# Altium PCB ROBOT_CONTROL.PcbDoc (part 2 of 2)
Units mm, origin at the board's own origin, x right, y up, seen from the top; angles counter-clockwise.
Board outline 110.37 x 59.34 mm, 2 copper layers (Top Layer, Bottom Layer); 66 components, 79 nets, 370 pads, 125 vias.
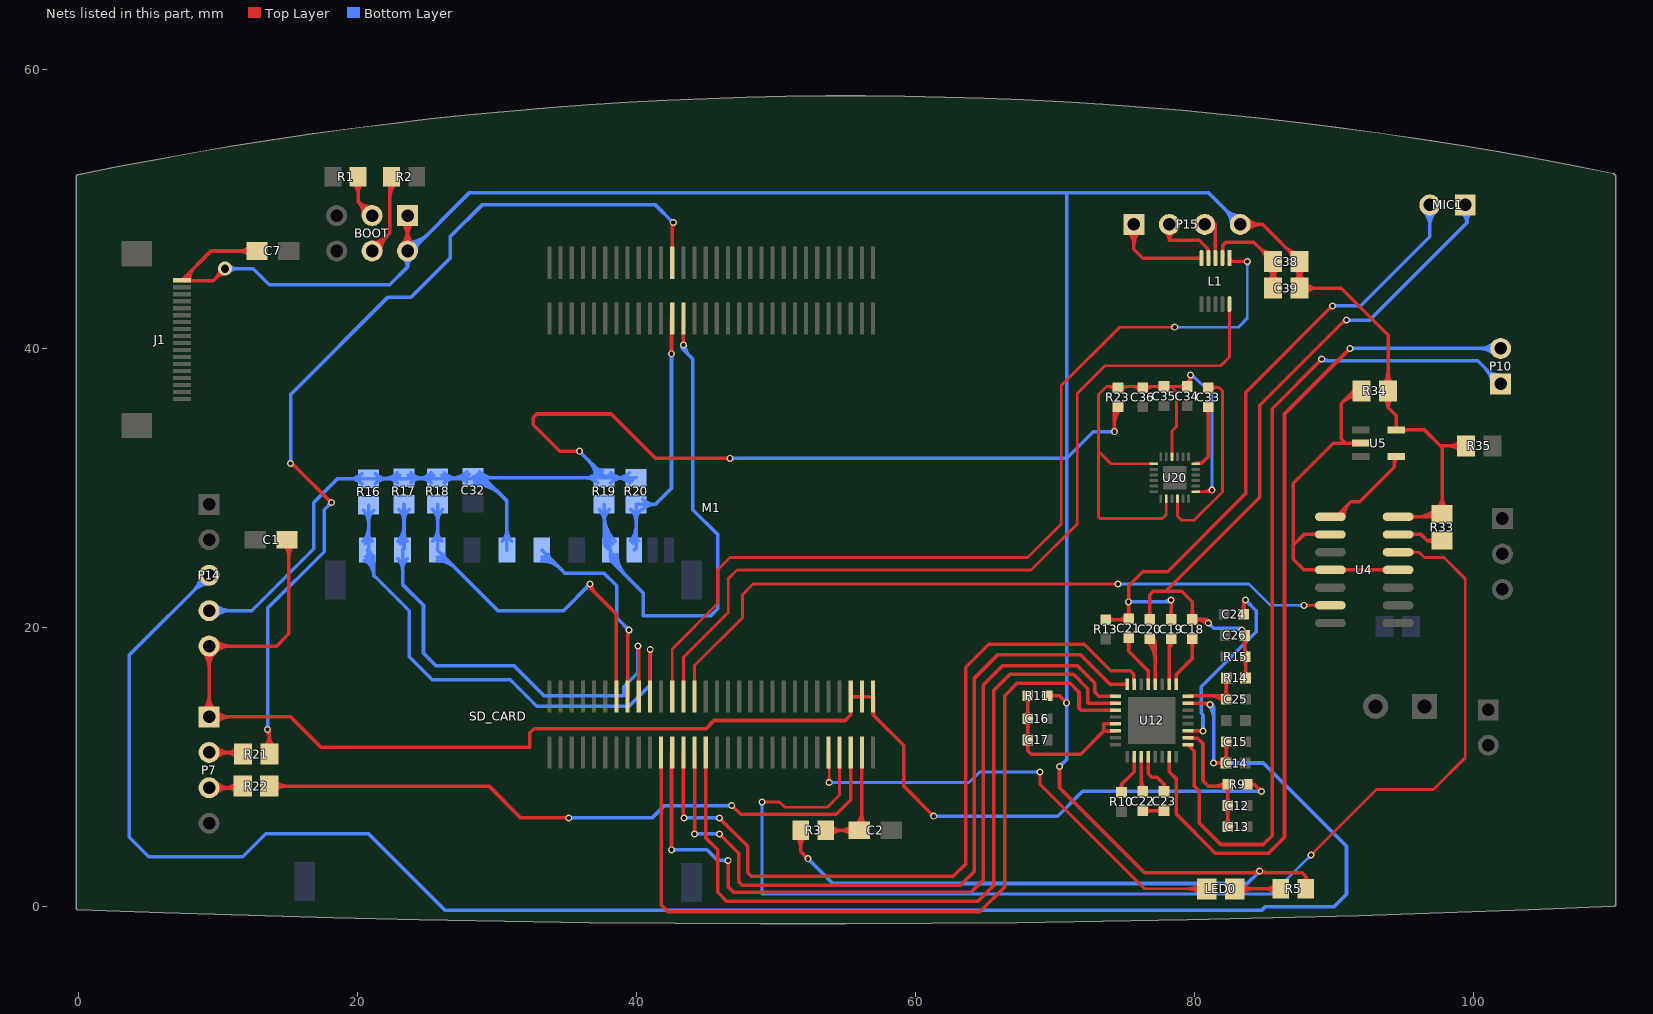
[diagram p2: the nets of this part, all layers, seen from the top]

## Via types
v1: diameter 0.5, hole 0.3, Top Layer to Bottom Layer, 114 vias
v2: diameter 0.7, hole 0.4, Top Layer to Bottom Layer, 9 vias
v3: diameter 1, hole 0.6, Top Layer to Bottom Layer, 2 vias

## Nets (pads, with @x,y where several pads share a name; then routed paths per layer and width w, separated by ;. In a path a pad name is that pad's centre, name@x,y a point inside that pad or via, vN(x,y) a via of type N, cw(c..) or ccw(c..) an arc to the next point about the centre after c; other vN are vias at no path point) (continued)
LED0: LED0.2 M1.J1_5 | length 40.1
  Top Layer w0.203: M1.J1_5@53.721,11.176 53.848,11.049 v1(53.848,8.89) ; v1@53.743,8.995 ccw(c53.49,9.248) 53.848,9.248 ccw(c54.206,9.248) v1@53.953,8.995 ; M1.J1_5@53.761,10.015 cw(c53.55,9.804) 53.848,9.804 ; v1@68.856,9.547 cw(c68.603,9.294) 68.961,9.294 cw(c69.319,9.294) v1@69.066,9.547 ; v1(68.961,9.652) 68.961,8.763 76.454,1.27 LED0.2@80.915,1.27 ; LED0.2@80.492,0.847 ccw(c79.47,-0.175) 79.47,1.27 ccw(c79.47,2.715) LED0.2@80.492,1.693 ; LED0.2@80.636,0.991 ccw(c79.961,0.316) 79.961,1.27 ccw(c79.961,2.224) LED0.2@80.636,1.549
  Bottom Layer w0.203: v1@53.721,8.89 v1(53.848,8.89) 63.881,8.89 64.643,9.652 v1(68.961,9.652) ; v1@53.953,8.785 cw(c54.206,8.532) 54.206,8.89 cw(c54.206,9.248) v1@53.953,8.995 ; v1@68.856,9.547 ccw(c68.603,9.294) 68.603,9.652 ccw(c68.603,10.01) v1@68.856,9.757
LED1: L1.3 P15.3 | length 3.2
  Top Layer w0.254: P15.3@80.772,48.895 81.534,48.895 L1.3@81.534,46.482
LED2: L1.4 P15.2 | length 7
  Top Layer w0.254: P15.2@77.894,48.371 cw(c77.495,47.752) 78.232,47.752 ; P15.2@78.232,48.895 78.232,47.752 ; P15.2@78.57,48.371 ccw(c78.969,47.752) 78.232,47.752 ; 80.871,47.249 cw(c80.534,46.912) L1.4@81.011,46.912 ; 80.924,47.197 cw(c80.7,46.973) L1.4@81.011,46.916 ; L1.4@81.034,46.482 81.011,46.505 81.011,47.11 80.369,47.752 78.232,47.752
LED3: L1.5 P15.1 | length 10.6
  Top Layer w0.254: P15.1@75.251,48.454 cw(c74.188,47.391) 75.692,47.391 cw(c77.196,47.391) P15.1@76.133,48.454 ; P15.1@75.431,48.634 cw(c74.801,48.004) 75.692,48.004 cw(c76.583,48.004) P15.1@75.953,48.634 ; P15.1@75.692,48.895 75.692,47.117 76.327,46.482 L1.5@80.534,46.482
NetBOOT_3: BOOT.3 R1.2 | length 8.4
  Top Layer w0.254: R1.2@19.743,51.89 cw(c18.935,51.082) 20.077,51.082 cw(c21.219,51.082) R1.2@20.411,51.89 ; R1.2@20.077,52.324 20.077,50.535 ; BOOT.3@20.46,49.555 ccw(c19.151,49.609) 20.077,50.535 ; BOOT.3@20.713,49.545 ccw(c19.938,49.577) 20.487,50.125 ccw(c21.035,50.674) BOOT.3@21.067,49.899 ; BOOT.3@21.057,50.152 cw(c21.003,51.461) 20.077,50.535 ; BOOT.3@21.082,49.53 20.077,50.535
NetBOOT_4: BOOT.4 R2.1 | length 12.2
  Top Layer w0.254: BOOT.4@21.082,46.99 22.352,48.26 22.352,52.197 R2.1@22.479,52.324 ; BOOT.4@21.082,47.359 ccw(c21.082,48.25) 21.712,47.62 ccw(c22.342,46.99) BOOT.4@21.451,46.99 ; BOOT.4@21.082,47.613 ccw(c21.082,49.117) 22.146,48.054 ccw(c23.209,46.99) BOOT.4@21.705,46.99 ; R2.1@22.145,51.89 cw(c21.644,51.389) 22.352,51.389 cw(c23.314,51.389) R2.1@22.634,52.069 ; 22.352,50.775 cw(c23.928,50.775) R2.1@22.813,51.89
NetC12_2: C12.2 C13.2 R9.1 U12.26 | length 13.6
  Top Layer w0.254: U12.26@79.563,12.085 79.583,12.065 80.264,12.065 80.645,11.684 80.645,9.017 81.026,8.636 82.296,8.636 R9.1@82.423,8.763 C12.2@82.423,7.239 C13.2@82.423,5.715 ; 81.503,8.636 ccw(c81.503,9.683) R9.1@82.243,8.943 ; C13.2@82.243,5.895 ccw(c81.81,6.328) 82.423,6.328 ccw(c83.036,6.328) C13.2@82.603,5.895 ; C12.2@82.243,7.059 cw(c81.81,6.626) 82.423,6.626 cw(c83.036,6.626) C12.2@82.603,7.059 ; C12.2@82.243,7.419 ccw(c81.81,7.852) 82.423,7.852 ccw(c83.036,7.852) C12.2@82.603,7.419 ; R9.1@82.243,8.583 cw(c81.81,8.15) 82.423,8.15 cw(c83.036,8.15) R9.1@82.603,8.583
NetC16_2: C16.2 C17.2 R11.2 U12.13 U12.14 | length 17.3
  Top Layer w0.254: C17.2@67.905,11.76 cw(c67.502,11.357) 68.072,11.357 ; C17.2@67.905,12.119 ccw(c67.471,12.553) 68.085,12.553 ccw(c68.698,12.553) C17.2@68.264,12.119 ; C16.2@67.905,13.284 cw(c67.471,12.85) 68.085,12.85 cw(c68.698,12.85) C16.2@68.264,13.284 ; C16.2@67.905,13.643 ccw(c67.471,14.077) 68.085,14.077 ccw(c68.698,14.077) C16.2@68.264,13.643 ; R11.2@67.905,14.935 cw(c67.471,14.501) 68.085,14.501 cw(c68.698,14.501) R11.2@68.264,14.935 ; 68.072,11.296 cw(c68.729,11.296) C17.2@68.264,11.76 ; C17.2@68.072,11.938 68.072,11.176 68.326,10.922 71.882,10.922 73.537,12.577 ; R11.2@68.072,15.24 68.085,15.227 R11.2@68.085,15.115 C16.2@68.085,13.464 C17.2@68.085,11.94 ; U12.14@74.349,12.573 74.353,12.577 73.537,12.577 ; U12.13@74.361,13.085 73.537,13.085 73.537,12.577
NetC18_1: C18.1 U12.1 | length 4.7
  Top Layer w0.254: U12.1@78.712,15.936 78.712,16.609 79.881,17.778 C18.1@79.881,19.19 ; C18.1@79.702,19.01 cw(c79.268,18.576) 79.881,18.576 cw(c80.495,18.576) C18.1@80.061,19.01
NetC18_2: C18.2 C20.2 C26.2 MIC1.1 R14.2 R15.2 | length 63.6
  Top Layer w0.254: C20.2@76.655,20.754 ccw(c76.222,21.187) 76.835,21.187 ccw(c77.448,21.187) C20.2@77.015,20.754 ; C20.2@76.835,20.574 76.835,22.352 77.089,22.606 77.978,22.606 ; C18.2@79.703,20.754 ccw(c79.27,21.187) 79.883,21.187 ccw(c80.496,21.187) 80.063,20.754 ccw(c80.496,21.187) 80.496,20.574 ccw(c80.496,19.961) C18.2@80.063,20.394 ; C18.2@80.116,20.574 cw(c80.116,19.41) v1@80.939,20.233 ; 80.729,20.574 cw(c80.729,20.023) v1@81.119,20.413 ; v1(81.026,20.32) 80.772,20.574 C18.2@79.883,20.574 79.883,21.844 79.121,22.606 77.978,22.606 ; C26.2@83.45,19.25 cw(c83.016,18.816) 83.629,18.816 cw(c84.243,18.816) C26.2@83.809,19.25 ; R15.2@83.501,17.726 cw(c83.036,17.262) 83.693,17.262 ; R15.2@83.501,18.085 ccw(c83.19,18.396) 83.629,18.396 ; R14.2@83.513,16.563 ccw(c83.08,16.996) 83.693,16.996 ccw(c84.306,16.996) R14.2@83.873,16.563 ; 83.629,18.641 ccw(c84.416,18.641) R15.2@83.86,18.085 ; C26.2@83.629,19.429 83.629,17.956 R15.2@83.68,17.905 83.693,17.893 R14.2@83.693,16.383 ; 83.693,17.323 cw(c84.263,17.323) R15.2@83.86,17.726 ; 90.505,41.737 cw(c90.932,41.31) v1@90.932,41.914 ; v1(90.932,42.037) 90.805,42.037 84.709,35.941 84.709,29.337 77.978,22.606
  Bottom Layer w0.254: v1@81.026,20.197 cw(c81.026,19.9) 81.236,20.11 cw(c81.446,20.32) v1@81.149,20.32 ; v1(81.026,20.32) 81.407,19.939 83.312,19.939 v1(83.439,19.812) ; 82.835,19.939 cw(c82.835,19.208) v1@83.352,19.725 ; v1(90.932,42.037) 92.583,42.037 99.568,49.022 MIC1.1@99.568,50.292 ; v1@91.019,41.95 cw(c91.229,41.74) 91.229,42.037 cw(c91.229,42.334) v1@91.019,42.124 ; MIC1.1@99.138,49.748 cw(c98.73,49.016) 99.568,49.016 ; MIC1.1@99.261,49.97 cw(c98.971,49.448) 99.568,49.448 ; 99.568,49.095 cw(c100.638,49.095) MIC1.1@99.882,49.851
NetC19_1: C19.1 U12.2 | length 4.2
  Top Layer w0.254: U12.2@78.212,15.936 78.212,19.044 C19.1@78.357,19.19 ; 78.212,18.226 cw(c79.322,18.226) C19.1@78.537,19.01
NetC19_2: C19.2 C21.2 MIC1.2 R13.2 | length 57.7
  Top Layer w0.254: R13.2@73.662,20.561 75.236,20.561 C21.2@75.313,20.637 75.313,21.842 v1(75.311,21.844) 75.311,22.987 76.327,24.003 78.105,24.003 83.693,29.591 83.693,36.83 v1(89.916,43.053) ; R13.2@73.841,20.382 cw(c74.275,19.948) 74.275,20.561 cw(c74.275,21.175) R13.2@73.841,20.741 ; 74.515,20.561 ccw(c74.515,21.435) 75.133,20.817 ccw(c74.699,21.251) 75.313,21.251 ccw(c75.926,21.251) C21.2@75.492,20.817 ; 74.883,20.561 cw(c74.883,20.208) C21.2@75.133,20.458 ; v1@75.224,21.757 cw(c75.01,21.543) 75.313,21.543 ; v1@75.224,21.931 ccw(c75.014,22.141) 75.311,22.141 ccw(c75.608,22.141) v1@75.398,21.931 ; 75.313,21.551 cw(c75.604,21.551) v1@75.398,21.757 ; C19.2@78.179,20.754 ccw(c77.746,21.187) 78.359,21.187 ccw(c78.972,21.187) C19.2@78.539,20.754 ; v1@78.272,21.884 cw(c78.062,21.674) 78.359,21.674 cw(c78.656,21.674) v1@78.446,21.884 ; C19.2@78.359,20.574 78.359,21.717 ; v1@89.793,43.053 cw(c89.496,43.053) 89.706,42.843 cw(c89.916,42.633) v1@89.916,42.93
  Bottom Layer w0.254: v1(75.311,21.844) 78.232,21.844 v1(78.359,21.971) ; v1@75.398,21.757 cw(c75.608,21.547) 75.608,21.844 cw(c75.608,22.141) v1@75.398,21.931 ; 77.755,21.844 ccw(c77.755,22.575) v1@78.272,22.058 ; v1(89.916,43.053) 91.948,43.053 96.901,48.006 MIC1.2@96.901,50.292 ; v1@90.003,42.966 cw(c90.213,42.756) 90.213,43.053 cw(c90.213,43.35) v1@90.003,43.14 ; MIC1.2@96.46,49.851 cw(c95.397,48.788) 96.901,48.788 cw(c98.405,48.788) MIC1.2@97.342,49.851 ; MIC1.2@96.64,50.031 cw(c96.01,49.401) 96.901,49.401 cw(c97.792,49.401) MIC1.2@97.162,50.031
NetC20_1: C20.1 U12.4 | length 6.5
  Top Layer w0.254: C20.1@76.654,19.01 cw(c75.306,17.662) 77.212,17.662 ; C20.1@77.013,19.369 cw(c76.532,18.889) C20.1@77.212,18.889 ; U12.4@77.212,15.936 77.212,18.811 C20.1@76.833,19.19 cw(c75.919,18.276) 77.212,18.276
NetC21_1: C21.1 U12.5 | length 4.9
  Top Layer w0.254: C21.1@75.131,19.074 cw(c74.698,18.64) 75.311,18.64 cw(c75.924,18.64) C21.1@75.491,19.074 ; C21.1@75.311,19.253 75.311,18.288 76.712,16.887 U12.5@76.712,15.936
NetC22_1: C22.1 U12.19 | length 3.3
  Top Layer w0.254: 76.212,9.137 ccw(c77.223,9.137) C22.1@76.508,8.422 ; U12.19@76.212,10.734 76.212,8.359 C22.1@76.329,8.242
NetC22_2: C22.2 C23.2 | length 3.5
  Top Layer w0.254: C22.2@76.327,6.858 C23.2@77.851,6.858 ; C22.2@76.507,6.678 cw(c76.94,6.245) 76.94,6.858 cw(c76.94,7.471) C22.2@76.507,7.038 ; C23.2@77.671,6.678 ccw(c77.238,6.245) 77.238,6.858 ccw(c77.238,7.471) C23.2@77.671,7.038
NetC23_1: C23.1 U12.20 | length 3.9
  Top Layer w0.254: U12.20@76.712,10.734 76.712,9.521 76.962,9.271 77.343,9.271 77.853,8.761 ; C23.1@77.697,8.443 ccw(c77.449,8.761) 77.853,8.761 ; C23.1@77.853,8.242 77.853,8.761 ; C23.1@78.008,8.443 cw(c78.256,8.761) 77.853,8.761
NetC24_2: C24.2 U12.27 | length 16.5
  Top Layer w0.254: U12.27@79.563,12.585 80.633,12.585 v1(80.645,12.573) ; 80.319,12.585 cw(c80.319,12.247) v1@80.558,12.486 ; 80.377,12.585 ccw(c80.377,12.841) v1@80.558,12.66 ; C24.2@83.374,21.133 ccw(c82.94,21.567) 83.553,21.567 ccw(c84.167,21.567) C24.2@83.733,21.133 ; C24.2@83.553,20.953 83.553,21.831 v1(83.693,21.971) ; 83.553,21.337 cw(c84.327,21.337) v1@83.78,21.884
  Bottom Layer w0.254: v1@80.558,12.66 ccw(c80.348,12.87) 80.645,12.87 ccw(c80.942,12.87) v1@80.732,12.66 ; v1(80.645,12.573) 80.645,13.716 80.518,13.843 80.518,15.748 84.455,19.685 84.455,21.209 v1(83.693,21.971) ; v1@83.693,21.848 cw(c83.693,21.551) 83.903,21.761 cw(c84.113,21.971) v1@83.816,21.971
NetC25_2: C25.2 R14.1 U12.32 | length 7.9
  Top Layer w0.254: U12.32@79.563,15.091 79.585,15.113 82.296,15.113 R14.1@82.296,16.51 ; 81.086,15.113 cw(c81.086,13.638) C25.2@82.129,14.681 ; 81.699,15.113 cw(c81.699,14.251) C25.2@82.309,14.861 ; C25.2@82.129,15.04 ccw(c81.726,15.443) 82.296,15.443 ; R14.1@82.129,16.205 cw(c81.726,15.802) 82.296,15.802 ; 82.296,15.504 ccw(c82.953,15.504) C25.2@82.488,15.04 ; 82.296,15.741 cw(c82.953,15.741) R14.1@82.488,16.205
NetC33_1: C33.1 U20.18 | length 5.6
  Top Layer w0.254: U20.18@80.114,31.764 80.532,31.764 81.026,32.258 C33.1@81.026,35.814 ; C33.1@80.846,35.634 cw(c80.413,35.201) 81.026,35.201 cw(c81.639,35.201) C33.1@81.206,35.634
NetC33_2: C33.2 U20.10 | length 14.9
  Top Layer w0.203: U20.10@78.814,29.237 78.814,27.993 79.121,27.686 80.01,27.686 82.042,29.718 82.042,36.957 81.801,37.198 C33.2@81.028,37.198 ; C33.2@81.225,37.001 cw(c81.702,36.524) 81.702,37.198 cw(c81.702,37.873) C33.2@81.225,37.396
NetC34_2: C34.2 C35.2 C36.2 R23.1 U20.1 U20.8 U20.13 U20.22 | length 52.7
  Top Layer w0.203: 74.06,37.274 ccw(c74.06,37.689) R23.1@74.353,37.396 ; R23.1@74.348,37.006 ccw(c73.724,36.414) 73.724,37.274 ; R23.1@74.748,37.001 cw(c75.409,36.34) 75.409,37.274 ; R23.1@74.748,37.396 ccw(c75.041,37.689) 75.041,37.274 ; 75.47,37.274 cw(c75.47,36.34) C36.2@76.131,37.001 ; 75.838,37.274 ccw(c75.838,37.689) C36.2@76.131,37.396 ; C36.2@76.526,37.001 cw(c77.187,36.34) 77.187,37.274 ; C36.2@76.526,37.396 ccw(c76.819,37.689) 76.819,37.274 ; U20.1@77.114,31.739 74.052,31.739 73.152,32.639 ; C35.2@77.655,37.077 ccw(c77.178,36.6) 77.178,37.274 ccw(c77.178,37.949) C35.2@77.655,37.472 ; U20.8@78.014,29.237 78.014,28.103 77.724,27.813 73.279,27.813 73.152,27.94 73.152,32.639 ; C35.2@78.089,37.126 cw(c78.359,36.955) 78.359,37.274 ; C35.2@78.089,37.423 ccw(c78.359,37.594) 78.359,37.274 ; U20.22@78.414,32.237 78.414,34.091 78.74,34.417 78.74,36.893 78.359,37.274 ; C34.2@79.306,37.077 ccw(c78.829,36.6) 78.829,37.274 ccw(c78.829,37.949) C34.2@79.306,37.472 ; C34.2@79.388,37.529 ccw(c79.129,38.1) v1(79.756,38.1) 79.756,37.592 C34.2@79.502,37.338 ; C34.2@79.472,37.344 ccw(c79.272,37.785) 79.756,37.785 ; C34.2@79.502,37.274 78.359,37.274 ; v1@79.651,37.995 cw(c79.398,37.742) 79.756,37.742 cw(c80.114,37.742) v1@79.861,37.995 ; U20.13@80.114,29.737 81.172,29.737 v1(81.28,29.845) ; 80.662,29.737 ccw(c80.662,30.463) v1@81.175,29.95 ; 73.152,32.639 73.152,36.703 73.724,37.274 ; 73.724,37.274 C35.2@77.853,37.274 78.359,37.274
  Bottom Layer w0.203: v1@79.756,37.952 cw(c79.756,37.287) 80.226,37.757 ; v1@79.756,38.227 81.28,36.703 v1(81.28,29.845) ; v1@81.175,29.95 ccw(c80.922,30.203) 81.28,30.203 ccw(c81.638,30.203) v1@81.385,29.95
NetC38_2: C38.2 C39.2 L1.2 | length 13.8
  Top Layer w0.254: L1.2@82.034,46.482 82.057,46.505 82.057,47.386 82.296,47.625 84.275,47.625 C38.2@85.672,46.228 C39.2@85.672,44.323 ; 84.608,47.292 ccw(c85.672,48.355) C38.2@85.672,46.851 ; 84.85,47.05 cw(c84.128,46.328) C38.2@85.149,46.328 ; C38.2@85.042,46.858 ccw(c85.672,47.488) C38.2@85.672,46.597 ; C39.2@85.302,44.793 ccw(c84.409,45.686) 85.672,45.686 ccw(c86.935,45.686) C39.2@86.042,44.793 ; C38.2@85.302,45.758 cw(c84.409,44.865) 85.672,44.865 cw(c86.935,44.865) C38.2@86.042,45.758
NetLED0_1: LED0.1 R5.1 | length 8.5
  Top Layer w0.254: LED0.1@82.915,1.27 R5.1@86.211,1.27 ; LED0.1@83.141,1.044 cw(c83.685,0.5) 83.685,1.27 cw(c83.685,2.04) LED0.1@83.141,1.496 ; LED0.1@83.32,0.865 cw(c84.298,-0.113) 84.298,1.27 cw(c84.298,2.653) LED0.1@83.32,1.675 ; R5.1@85.877,0.936 ccw(c85.069,0.128) 85.069,1.27 ccw(c85.069,2.412) R5.1@85.877,1.604
NetP7_2: P7.2 R21.2 | length 8.8
  Top Layer w0.254: P7.2@9.398,11.049 11.689,11.049 R21.2@11.816,10.922 ; P7.2@9.659,10.788 cw(c10.289,10.158) 10.289,11.049 cw(c10.289,11.94) P7.2@9.659,11.31 ; P7.2@9.839,10.608 cw(c10.902,9.545) 10.902,11.049 cw(c10.902,12.553) P7.2@9.839,11.49 ; 10.488,11.049 cw(c10.488,9.694) R21.2@11.446,10.652 ; 10.619,11.049 ccw(c10.619,12.219) R21.2@11.446,11.392 ; 11.101,11.049 cw(c11.101,10.307) R21.2@11.626,10.832
NetP7_3: P7.3 R22.2 | length 8.8
  Top Layer w0.254: P7.3@9.398,8.509 11.684,8.509 R22.2@11.811,8.636 ; P7.3@9.659,8.248 cw(c10.289,7.618) 10.289,8.509 cw(c10.289,9.4) P7.3@9.659,8.77 ; P7.3@9.839,8.068 cw(c10.902,7.005) 10.902,8.509 cw(c10.902,10.013) P7.3@9.839,8.95 ; 10.483,8.509 ccw(c10.483,9.864) R22.2@11.441,8.906 ; 10.614,8.509 cw(c10.614,7.339) R22.2@11.441,8.166 ; 11.096,8.509 ccw(c11.096,9.251) R22.2@11.621,8.726
NetP10_1: P10.1 U12.25 | length 66.4
  Top Layer w0.254: U12.25@79.563,11.585 80.01,11.138 80.01,8.636 80.391,8.255 80.391,5.969 81.915,4.445 84.963,4.445 85.598,5.08 85.598,35.687 v1(89.154,39.243) ; U12.25@79.837,11.586 ccw(c80.05,11.454) 79.872,11.276 ; v1@89.031,39.243 cw(c88.734,39.243) 88.944,39.033 cw(c89.154,38.823) v1@89.154,39.12
  Bottom Layer w0.254: v1(89.154,39.243) 89.281,39.116 100.33,39.116 P10.1@101.981,37.465 ; v1@89.241,39.33 ccw(c89.758,39.847) 89.758,39.116 ; P10.1@101.358,37.465 ccw(c99.854,37.465) 100.917,38.529 ccw(c101.981,39.592) P10.1@101.981,38.088 ; P10.1@101.612,37.465 ccw(c100.721,37.465) 101.351,38.095 ccw(c101.981,38.725) P10.1@101.981,37.834
NetP10_2: P10.2 U12.23 | length 66.2
  Top Layer w0.254: U12.23@78.212,10.734 78.232,10.714 78.232,9.652 78.74,9.144 78.74,6.604 81.534,3.81 85.344,3.81 86.487,4.953 86.487,35.306 v1(91.186,40.005) ; v1@91.063,40.005 cw(c90.766,40.005) 90.976,39.795 cw(c91.186,39.585) v1@91.186,39.882
  Bottom Layer w0.254: v1(91.186,40.005) P10.2@101.981,40.005 ; v1@91.273,39.918 cw(c91.483,39.708) 91.483,40.005 cw(c91.483,40.302) v1@91.273,40.092 ; P10.2@101.54,39.564 ccw(c100.477,38.501) 100.477,40.005 ccw(c100.477,41.509) P10.2@101.54,40.446 ; P10.2@101.72,39.744 ccw(c101.09,39.114) 101.09,40.005 ccw(c101.09,40.896) P10.2@101.72,40.266
NetR10_2: R10.2 U12.18 | length 3.8
  Top Layer w0.254: R10.2@74.634,8.38 ccw(c74.285,8.765) 74.805,8.765 ; R10.2@74.805,8.191 74.805,8.765 ; R10.2@74.975,8.38 cw(c75.324,8.765) 74.805,8.765 ; U12.18@75.712,10.734 75.712,9.672 74.805,8.765
NetR33_1: R33.1 U4.13 | length 5.3
  Top Layer w0.254: U4.13@94.627,26.67 96.266,26.67 96.708,26.228 ; U4.13@95.549,26.548 cw(c95.845,26.252) 95.845,26.67 cw(c95.845,27.088) U4.13@95.549,26.792 ; R33.1@97.256,25.936 ccw(c96.708,25.568) 96.708,26.228 ; R33.1@97.256,26.52 cw(c96.708,26.888) 96.708,26.228 ; R33.1@97.79,26.228 96.708,26.228
SAI1_FSA: M1.J1_18 U12.7 | length 58.3
  Top Layer w0.254: 43.395,6.741 ccw(c43.825,6.741) v1@43.521,6.437 ; M1.J1_18@43.395,11.049 43.395,6.389 v1(43.434,6.35) ; v1@45.974,6.227 cw(c45.974,5.93) 46.184,6.14 cw(c46.394,6.35) v1@46.097,6.35 ; v1(45.974,6.35) 48.006,4.318 48.006,2.413 48.26,2.159 62.738,2.159 63.627,3.048 63.627,17.145 65.278,18.796 72.136,18.796 74.041,16.891 75.438,16.891 75.692,16.637 75.692,15.956 U12.7@75.712,15.936
  Bottom Layer w0.254: v1(43.434,6.35) v1(45.974,6.35) ; v1@43.521,6.263 cw(c43.731,6.053) 43.731,6.35 cw(c43.731,6.647) v1@43.521,6.437 ; v1@45.887,6.263 ccw(c45.677,6.053) 45.677,6.35 ccw(c45.677,6.647) v1@45.887,6.437
SAI1_MCLKA: M1.J1_20 U12.11 | length 60
  Top Layer w0.254: M1.J1_20@41.795,11.049 41.795,0.115 42.291,-0.381 64.643,-0.381 66.421,1.397 66.421,15.113 67.31,16.002 71.12,16.002 71.755,15.367 71.755,14.224 71.894,14.085 U12.11@74.361,14.085
SAI1_SCKA: M1.J1_17 U12.8 | length 57.2
  Top Layer w0.254: v1@44.109,5.294 ccw(c43.901,5.502) 44.195,5.502 ; 44.195,5.506 ccw(c44.495,5.506) v1@44.283,5.294 ; M1.J1_17@44.195,11.049 v1(44.196,5.207) v1(44.196,5.207) ; v1@45.974,5.084 cw(c45.974,4.787) 46.184,4.997 cw(c46.394,5.207) v1@46.097,5.207 ; v1(45.974,5.207) 47.371,3.81 47.371,1.778 47.625,1.524 55.191,1.524 ; 55.261,1.524 63.246,1.524 64.262,2.54 64.262,16.383 65.913,18.034 71.882,18.034 73.98,15.936 U12.8@75.212,15.936
  Bottom Layer w0.254: v1(44.196,5.207) v1(45.974,5.207) ; v1@44.283,5.12 cw(c44.493,4.91) 44.493,5.207 cw(c44.493,5.504) v1@44.283,5.294 ; v1@45.887,5.12 ccw(c45.677,4.91) 45.677,5.207 ccw(c45.677,5.504) v1@45.887,5.294
SAI1_SDA: M1.J1_16 U12.10 | length 55.5
  Top Layer w0.254: M1.J1_16@44.995,11.049 44.995,4.916 45.847,4.064 45.847,1.016 46.482,0.381 64.516,0.381 65.659,1.524 65.659,15.494 66.802,16.637 71.374,16.637 72.39,15.621 72.39,14.631 72.436,14.585 U12.10@74.361,14.585
SAI1_SDB: M1.J1_19 U12.9 | length 59.4
  Top Layer w0.254: v1@42.458,4.151 ccw(c42.248,4.361) 42.545,4.361 ccw(c42.842,4.361) v1@42.632,4.151 ; v1(42.545,4.064) 42.545,10.999 M1.J1_19@42.595,11.049 ; 42.545,9.873 cw(c42.771,9.873) M1.J1_19@42.611,10.033 ; v1@46.522,3.215 cw(c46.312,3.005) 46.609,3.005 cw(c46.906,3.005) v1@46.696,3.215 ; v1(46.609,3.302) 46.609,1.397 46.99,1.016 64.008,1.016 64.897,1.905 64.897,15.875 66.294,17.272 71.628,17.272 72.898,16.002 72.898,15.367 73.18,15.085 U12.9@74.361,15.085
  Bottom Layer w0.254: v1(42.545,4.064) 45.085,4.064 45.847,3.302 v1(46.609,3.302) ; v1@42.632,3.977 cw(c42.842,3.767) 42.842,4.064 cw(c42.842,4.361) v1@42.632,4.151 ; v1@46.522,3.215 ccw(c46.312,3.005) 46.312,3.302 ccw(c46.312,3.599) v1@46.522,3.389
SDB: L1.1 M1.J1_42 | length 69.4
  Top Layer w0.203: M1.J1_42@42.595,15.049 42.595,18.465 45.847,21.717 45.847,24.13 46.736,25.019 68.072,25.019 70.485,27.432 70.485,37.338 74.676,41.529 v1(78.613,41.529) ; v1@78.508,41.424 ccw(c78.255,41.171) 78.255,41.529 ccw(c78.255,41.887) v1@78.508,41.634 ; L1.1@82.534,46.482 82.788,46.228 v1(83.82,46.228) ; v1@83.715,46.123 ccw(c83.462,45.87) 83.462,46.228 ccw(c83.462,46.586) v1@83.715,46.333
  Bottom Layer w0.203: v1(78.613,41.529) 83.185,41.529 83.82,42.164 v1(83.82,46.228) ; v1@78.718,41.424 cw(c78.971,41.171) 78.971,41.529 cw(c78.971,41.887) v1@78.718,41.634 ; v1@83.715,46.123 cw(c83.462,45.87) 83.82,45.87 cw(c84.178,45.87) v1@83.925,46.123
SDIO_CMD: M1.J1_37 R18.1 SD_CARD.2 | length 33.4
  Top Layer w0.254: v1(36.703,23.114) 36.703,22.86 38.595,20.968 M1.J1_37@38.595,15.049 ; v1@36.826,23.114 ccw(c37.736,23.114) 37.093,22.47
  Bottom Layer w0.254: R18.1@25.411,28.464 cw(c24.518,27.571) 25.781,27.571 cw(c27.044,27.571) R18.1@26.151,28.464 ; SD_CARD.2@25.421,26.196 ccw(c24.552,27.065) 25.781,27.065 ; SD_CARD.2@25.756,24.789 cw(c25.756,22.922) 27.075,24.242 ; SD_CARD.2@25.756,25.043 cw(c25.756,23.79) 26.642,24.676 ; 25.781,26.942 ccw(c26.836,26.942) SD_CARD.2@26.09,26.196 ; R18.1@25.781,28.834 25.781,25.587 SD_CARD.2@25.756,25.562 30.108,21.209 34.798,21.209 v1(36.703,23.114) ; SD_CARD.2@26.229,25.262 ccw(c26.646,25.262) SD_CARD.2@26.351,24.966 ; v1@36.58,23.114 cw(c36.283,23.114) 36.493,22.904 cw(c36.703,22.694) v1@36.703,22.991
SDIO_D0: M1.J2_18 R19.1 SD_CARD.7 | length 49.5
  Top Layer w0.254: v1@43.307,40.346 ccw(c43.097,40.556) 43.394,40.556 ccw(c43.691,40.556) v1@43.481,40.346 ; v1(43.394,40.259) M1.J2_18@43.394,42.149
  Bottom Layer w0.254: R19.1@37.349,28.464 cw(c36.456,27.571) 37.719,27.571 cw(c38.982,27.571) R19.1@38.089,28.464 ; SD_CARD.7@37.719,26.254 ccw(c38.576,26.254) SD_CARD.7@37.97,25.648 ; 37.719,26.867 ccw(c39.189,26.867) SD_CARD.7@38.15,25.828 ; 37.719,27.481 ccw(c39.803,27.481) SD_CARD.7@38.329,26.007 ; 37.719,28.094 ccw(c40.416,28.094) SD_CARD.7@38.509,26.187 ; R19.1@37.719,28.834 37.719,26.008 SD_CARD.7@38.174,25.552 38.174,24.818 40.513,22.479 ; SD_CARD.7@38.139,25.252 ccw(c39.105,25.252) 38.422,24.57 ; SD_CARD.7@38.393,25.252 ccw(c39.972,25.252) 38.856,24.136 ; SD_CARD.7@38.647,25.252 ccw(c40.839,25.252) 39.289,23.703 ; 40.513,22.431 40.513,20.828 45.339,20.828 45.847,21.336 45.847,26.67 44.069,28.448 44.069,39.243 43.394,39.918 v1(43.394,40.259) ; v1@43.263,40.259 ccw(c43.77,40.259) 43.411,39.901 ; v1@43.517,40.259 ccw(c44.637,40.259) 43.845,39.467
SDIO_D1: M1.J2_19 R20.1 SD_CARD.8 | length 25.9
  Top Layer w0.254: v1@42.458,39.711 ccw(c42.248,39.921) 42.545,39.921 ccw(c42.842,39.921) v1@42.632,39.711 ; v1(42.545,39.624) 42.545,42.1 M1.J2_19@42.594,42.149 ; 42.545,40.975 cw(c42.768,40.975) M1.J2_19@42.61,41.132
  Bottom Layer w0.254: SD_CARD.8@39.579,26.211 ccw(c38.55,27.239) 40.005,27.239 ; R20.1@39.635,28.459 cw(c38.742,27.566) 40.005,27.566 cw(c41.268,27.566) R20.1@40.375,28.459 ; SD_CARD.8@39.759,26.031 ccw(c39.163,26.626) 40.005,26.626 ccw(c40.593,26.626) SD_CARD.8@40.177,26.211 ; SD_CARD.8@39.878,25.562 40.005,25.689 R20.1@40.005,28.829 41.402,28.829 42.545,29.972 v1(42.545,39.624) ; R20.1@40.475,28.459 cw(c41.368,27.566) 41.368,28.829 cw(c41.368,30.092) R20.1@40.475,29.199 ; v1@42.458,39.537 cw(c42.248,39.327) 42.545,39.327 cw(c42.842,39.327) v1@42.632,39.537
SDIO_D2: M1.J1_40 R16.1 SD_CARD.9 | length 46.1
  Top Layer w0.254: M1.J1_40@40.995,15.049 40.995,18.389 v1(41.021,18.415) ; 40.995,18.055 cw(c41.381,18.055) v1@41.108,18.328
  Bottom Layer w0.254: SD_CARD.9@20.415,26.187 ccw(c19.418,27.184) 20.828,27.184 ; R16.1@20.458,28.398 cw(c19.565,27.505) 20.828,27.505 cw(c22.091,27.505) R16.1@21.198,28.398 ; SD_CARD.9@20.523,24.837 cw(c19.891,23.68) 21.209,23.68 ; SD_CARD.9@20.595,26.007 ccw(c20.031,26.571) 20.828,26.571 ; SD_CARD.9@20.644,25.06 cw(c20.125,24.109) 21.209,24.109 ; SD_CARD.9@20.766,25.283 cw(c20.358,24.537) 21.209,24.537 ; 20.828,26.805 ccw(c21.702,26.805) SD_CARD.9@21.084,26.187 ; R16.1@20.828,28.768 20.828,25.631 SD_CARD.9@20.749,25.552 21.209,25.093 21.209,23.749 23.749,21.209 23.749,17.907 25.4,16.256 30.988,16.256 32.893,14.351 39.497,14.351 41.021,15.875 v1(41.021,18.415) ; v1@40.934,18.328 cw(c40.724,18.118) 41.021,18.118 cw(c41.318,18.118) v1@41.108,18.328
SDIO_D3: M1.J1_39 R17.1 SD_CARD.1 | length 41.8
  Top Layer w0.254: v1@40.045,18.582 cw(c39.683,18.22) 40.195,18.22 ; v1(40.132,18.669) 40.195,18.606 M1.J1_39@40.195,15.049
  Bottom Layer w0.254: SD_CARD.1@22.932,24.927 cw(c22.124,24.12) 23.266,24.12 cw(c24.408,24.12) SD_CARD.1@23.601,24.927 ; SD_CARD.1@22.932,26.196 ccw(c21.879,27.249) 23.368,27.249 ; R17.1@22.998,28.464 cw(c22.105,27.571) 23.368,27.571 cw(c24.631,27.571) R17.1@23.738,28.464 ; SD_CARD.1@23.112,26.016 ccw(c22.492,26.636) 23.368,26.636 ; 23.368,26.758 ccw(c24.163,26.758) SD_CARD.1@23.601,26.196 ; R17.1@23.368,28.834 23.368,25.663 SD_CARD.1@23.266,25.562 23.266,23.089 24.765,21.59 24.765,18.161 25.654,17.272 31.242,17.272 33.401,15.113 39.116,15.113 39.116,15.748 40.132,16.764 40.132,18.542 v1@40.259,18.669 ; v1@40.045,18.582 cw(c39.835,18.372) 40.132,18.372 cw(c40.429,18.372) v1@40.219,18.582
SDIO_SCK: M1.J1_38 SD_CARD.5 | length 18.7
  Top Layer w0.254: M1.J1_38@39.395,15.049 39.395,19.71 v1(39.497,19.812) ; 39.395,19.269 cw(c40.04,19.269) v1@39.584,19.725
  Bottom Layer w0.254: SD_CARD.5@33.249,24.779 cw(c33.249,22.913) 34.569,24.233 ; SD_CARD.5@33.249,25.033 cw(c33.249,23.78) 34.135,24.666 ; SD_CARD.5@33.249,25.552 34.926,23.876 37.719,23.876 38.608,22.987 38.608,20.701 v1(39.497,19.812) v1@39.624,19.685 ; SD_CARD.5@33.722,25.252 ccw(c34.14,25.252) SD_CARD.5@33.845,24.957 ; v1@39.374,19.812 ccw(c39.077,19.812) 39.287,20.022 ccw(c39.497,20.232) v1@39.497,19.935
TXD_O: R34.1 U4.2 U4.4 U4.11 U5.2 | length 33.7
  Top Layer w0.254: U4.4@88.855,24.008 ccw(c88.559,23.712) 88.559,24.13 ccw(c88.559,24.548) U4.4@88.855,24.252 ; U4.2@88.855,26.548 ccw(c88.559,26.252) 88.559,26.67 ccw(c88.559,27.088) U4.2@88.855,26.792 ; U4.2@89.777,26.67 87.884,26.67 87.122,25.908 ; 90.586,36.103 cw(c91.788,34.9) R34.1@91.983,36.59 ; U4.4@90.699,24.008 cw(c90.995,23.712) 90.995,24.13 cw(c90.995,24.548) U4.4@90.699,24.252 ; 90.958,36.475 cw(c91.865,35.567) R34.1@92.012,36.842 ; 91.329,36.846 cw(c91.942,36.233) R34.1@92.041,37.094 ; U5.2@91.477,33.123 ccw(c91.26,32.906) 91.26,33.213 ccw(c91.26,33.52) U5.2@91.477,33.303 ; U5.2@91.948,33.213 90.866,33.213 ; R34.1@92.014,36.957 91.44,36.957 90.551,36.068 90.551,33.528 90.866,33.213 ; U4.11@93.705,24.008 ccw(c93.409,23.712) 93.409,24.13 ccw(c93.409,24.548) U4.11@93.705,24.252 ; U4.11@94.627,24.13 U4.4@89.777,24.13 87.884,24.13 87.122,24.892 87.122,25.908 ; 87.122,25.908 87.122,30.353 89.982,33.213 90.866,33.213
TXEN: U4.1 U5.4 | length 9
  Top Layer w0.254: U4.1@90.165,27.94 91.246,29.021 91.886,29.021 94.361,31.496 94.361,32.136 U5.4@94.488,32.263 ; U4.1@90.242,27.94 cw(c90.428,27.94) U4.1@90.296,28.071 ; U4.1@90.496,27.94 cw(c91.295,27.94) 90.73,28.505 ; U4.1@90.75,27.94 cw(c92.162,27.94) 91.164,28.939 ; 94.361,31.65 cw(c95.101,31.65) U5.4@94.578,32.173
UART4_RX: M1.J1_3 R22.1 | length 50.9
  Top Layer w0.254: R22.1@13.711,8.636 29.464,8.636 31.75,6.35 v1(35.179,6.35) ; R22.1@14.081,8.266 cw(c14.974,7.373) 14.974,8.636 cw(c14.974,9.899) R22.1@14.081,9.006 ; v1@35.092,6.263 ccw(c34.882,6.053) 34.882,6.35 ccw(c34.882,6.647) v1@35.092,6.437 ; v1@46.863,7.116 cw(c46.863,6.819) 47.073,7.029 cw(c47.283,7.239) v1@46.986,7.239 ; v1(46.863,7.239) 47.498,6.604 54.356,6.604 55.395,7.643 M1.J1_3@55.395,11.049
  Bottom Layer w0.254: v1(35.179,6.35) 41.148,6.35 42.037,7.239 v1(46.863,7.239) ; v1@35.266,6.263 cw(c35.476,6.053) 35.476,6.35 cw(c35.476,6.647) v1@35.266,6.437 ; v1@46.776,7.152 ccw(c46.566,6.942) 46.566,7.239 ccw(c46.566,7.536) v1@46.776,7.326
UART4_TX: M1.J2_42 R21.1 | length 72.3
  Top Layer w0.254: R21.1@13.346,11.392 ccw(c12.453,12.285) 13.716,12.285 ccw(c14.979,12.285) R21.1@14.086,11.392 ; v1@13.502,12.613 cw(c12.985,12.096) 13.716,12.096 ; v1(13.589,12.7) 13.716,12.573 R21.1@13.716,10.922 ; v1@15.24,31.627 cw(c15.24,31.023) 15.667,31.45 ; v1(15.24,31.75) 15.367,31.75 v1(18.161,28.956) ; v1@18.038,28.956 ccw(c17.741,28.956) 17.951,29.166 ccw(c18.161,29.376) v1@18.161,29.079 ; M1.J2_42@42.594,46.149 42.594,48.944 v1(42.672,49.022) ; 42.594,48.537 cw(c43.157,48.537) v1@42.759,48.935
  Bottom Layer w0.254: v1@13.502,12.787 ccw(c13.292,12.997) 13.589,12.997 ccw(c13.886,12.997) v1@13.676,12.787 ; v1(13.589,12.7) 13.589,21.371 17.653,25.435 17.653,28.448 v1(18.161,28.956) ; v1@15.153,31.837 ccw(c14.943,32.047) 15.24,32.047 ccw(c15.537,32.047) v1@15.327,31.837 ; v1(15.24,31.75) 15.24,36.703 22.225,43.688 23.876,43.688 26.67,46.482 26.67,48.006 28.956,50.292 41.402,50.292 v1(42.672,49.022) v1@42.672,48.895 ; v1@18.038,28.956 cw(c17.741,28.956) 17.951,28.746 cw(c18.161,28.536) v1@18.161,28.833 ; v1@42.549,49.022 ccw(c42.252,49.022) 42.462,49.232 ccw(c42.672,49.442) v1@42.672,49.145
USART2_RX: M1.J1_44 U4.6 | length 54.9
  Top Layer w0.203: M1.J1_44@44.196,15.113 44.196,17.272 47.625,20.701 47.625,22.352 48.387,23.114 v1(74.549,23.114) ; v1@74.444,23.009 ccw(c74.191,22.756) 74.191,23.114 ccw(c74.191,23.472) v1@74.444,23.219 ; v1@87.757,21.59 v1(87.884,21.59) U4.6@89.777,21.59 ; v1@87.989,21.485 cw(c88.242,21.232) 88.242,21.59 cw(c88.242,21.948) v1@87.989,21.695 ; U4.6@88.837,21.45 ccw(c88.498,21.111) 88.498,21.59 ccw(c88.498,22.069) U4.6@88.837,21.73
  Bottom Layer w0.203: v1(74.549,23.114) 83.947,23.114 85.471,21.59 v1(87.884,21.59) ; v1@74.654,23.009 cw(c74.907,22.756) 74.907,23.114 cw(c74.907,23.472) v1@74.654,23.219 ; v1@87.779,21.485 ccw(c87.526,21.232) 87.526,21.59 ccw(c87.526,21.948) v1@87.779,21.695
USART2_TX: M1.J1_4 U4.12 | length 91.5
  Top Layer w0.203: v1(49.022,7.493) 50.292,7.493 50.673,7.112 53.721,7.112 54.595,7.986 M1.J1_4@54.595,11.049 ; v1@49.127,7.388 cw(c49.38,7.135) 49.38,7.493 cw(c49.38,7.851) v1@49.127,7.598 ; v1(88.392,3.683) 93.091,8.382 97.155,8.382 99.441,10.668 99.441,23.495 97.917,25.019 96.52,25.019 96.139,25.4 U4.12@94.742,25.4 ; v1@88.392,3.831 ccw(c88.392,4.19) 88.645,3.936 ccw(c88.899,3.683) v1@88.54,3.683 ; U4.12@95.567,25.26 cw(c95.906,24.921) 95.906,25.4 cw(c95.906,25.879) U4.12@95.567,25.54
  Bottom Layer w0.203: v1@48.917,7.388 cw(c48.664,7.135) 49.022,7.135 cw(c49.38,7.135) v1@49.127,7.388 ; v1(49.022,7.493) 49.022,0.889 85.598,0.889 v1(88.392,3.683) ; v1@88.244,3.683 cw(c87.885,3.683) 88.139,3.43 cw(c88.392,3.176) v1@88.392,3.535
V_BM: L1.10 M1.J1_43 | length 61.5
  Top Layer w0.203: M1.J1_43@43.395,15.049 43.395,17.868 46.609,21.082 46.609,23.495 47.244,24.13 68.326,24.13 71.628,27.432 71.628,36.767 73.628,38.767 81.915,38.767 82.534,39.386 L1.10@82.534,43.182
VCC3.3: BOOT.1 BOOT.2 C7.1 C32.2 C38.1 C39.1 J1.1 P14.4 P15.4 R3.2 R5.2 R11.1 R16.2 R17.2 R18.2 R19.2 R20.2 R23.2 R33.2 R34.2 R35.2 SD_CARD.4 U4.14 U5.5 | length 430.6
  Top Layer w0.254: J1.1@7.467,44.921 9.536,46.99 C7.1@12.827,46.99 ; J1.1@7.482,44.89 cw(c7.593,44.89) J1.1@7.515,44.969 ; J1.1@7.493,44.867 9.688,44.867 v3(10.541,45.72) ; J1.1@7.736,44.89 cw(c8.46,44.89) 7.948,45.402 ; J1.1@7.99,44.89 cw(c9.327,44.89) 8.382,45.836 ; v3@10.168,45.72 cw(c9.268,45.72) 9.904,45.083 cw(c10.541,44.447) v3@10.541,45.347 ; C7.1@12.341,46.631 ccw(c11.474,45.764) 11.474,46.99 ccw(c11.474,48.216) C7.1@12.341,47.349 ; BOOT.2@23.181,47.431 ccw(c22.118,48.494) 23.622,48.494 ccw(c25.126,48.494) BOOT.2@24.063,47.431 ; BOOT.1@23.181,49.089 cw(c22.118,48.026) 23.622,48.026 cw(c25.126,48.026) BOOT.1@24.063,49.089 ; BOOT.2@23.361,47.251 ccw(c22.731,47.881) 23.622,47.881 ccw(c24.513,47.881) BOOT.2@23.883,47.251 ; BOOT.1@23.361,49.269 cw(c22.731,48.639) 23.622,48.639 cw(c24.513,48.639) BOOT.1@23.883,49.269 ; BOOT.2@23.622,46.99 BOOT.1@23.622,49.53 ; v1@35.854,32.552 ccw(c35.644,32.342) 35.644,32.639 ccw(c35.644,32.936) v1@35.854,32.726 ; v1(35.941,32.639) 34.544,32.639 32.639,34.544 32.639,35.052 32.893,35.306 38.227,35.306 41.402,32.131 v1(46.736,32.131) ; v1@46.649,32.044 ccw(c46.439,31.834) 46.439,32.131 ccw(c46.439,32.428) v1@46.649,32.218 ; R3.2@51.471,5.027 cw(c50.663,4.219) 51.805,4.219 cw(c52.947,4.219) R3.2@52.139,5.027 ; R3.2@51.805,5.461 51.805,3.948 v1(52.324,3.429) ; v1@52.201,3.429 ccw(c51.904,3.429) 52.114,3.639 ccw(c52.324,3.849) v1@52.324,3.552 ; R11.1@69.469,15.113 70.358,15.113 v1(70.866,14.605) ; R11.1@69.649,14.933 cw(c70.082,14.5) 70.082,15.113 cw(c70.082,15.726) R11.1@69.649,15.293 ; v1@70.271,9.946 cw(c70.061,9.736) 70.358,9.736 cw(c70.655,9.736) v1@70.445,9.946 ; v1(70.358,10.033) 70.358,8.509 76.454,2.413 84.582,2.413 v1(84.709,2.54) 84.836,2.413 87.757,2.413 88.011,2.159 ; v1@70.743,14.605 ccw(c70.446,14.605) 70.656,14.815 ccw(c70.866,15.025) v1@70.866,14.728 ; v1@74.208,34.123 ccw(c73.998,34.333) 74.295,34.333 ccw(c74.592,34.333) v1@74.382,34.123 ; v1(74.295,34.036) 74.295,35.433 R23.2@74.676,35.814 ; 74.295,34.588 cw(c75.775,34.588) R23.2@74.729,35.634 ; 74.295,35.201 cw(c75.162,35.201) R23.2@74.549,35.814 ; P15.4@83.312,48.895 84.905,48.895 C38.1@87.572,46.228 C39.1@87.572,44.323 90.551,44.323 93.914,40.96 R34.2@93.914,36.957 93.914,35.753 ; P15.4@83.573,48.634 cw(c84.203,48.004) 84.203,48.895 cw(c84.203,49.786) P15.4@83.573,49.156 ; P15.4@83.753,48.454 cw(c84.816,47.391) 84.816,48.895 cw(c84.816,50.399) P15.4@83.753,49.336 ; 84.105,2.413 ccw(c84.105,3.144) v1@84.622,2.627 ; v1@84.796,2.627 ccw(c85.313,3.144) 85.313,2.413 ; 86.508,47.292 ccw(c87.572,48.355) C38.1@87.572,46.851 ; 86.75,47.05 cw(c86.028,46.328) C38.1@87.049,46.328 ; C38.1@86.942,46.858 ccw(c87.572,47.488) C38.1@87.572,46.597 ; C39.1@87.202,44.793 ccw(c86.309,45.686) 87.572,45.686 ccw(c88.835,45.686) C39.1@87.942,44.793 ; C38.1@87.202,45.758 cw(c86.309,44.865) 87.572,44.865 cw(c88.835,44.865) C38.1@87.942,45.758 ; R5.2@87.788,1.787 ccw(c87.59,2.159) 88.011,2.159 ; C39.1@87.942,43.953 cw(c88.835,43.06) 88.835,44.323 cw(c88.835,45.586) C39.1@87.942,44.693 ; R5.2@88.011,1.27 88.011,2.159 ; R5.2@88.234,1.787 cw(c88.432,2.159) 88.011,2.159 ; R34.2@93.544,37.427 ccw(c92.651,38.32) 93.914,38.32 ccw(c95.177,38.32) R34.2@94.284,37.427 ; R34.2@93.583,36.452 cw(c93.01,35.753) 93.914,35.753 ; R34.2@94.245,36.452 ccw(c94.818,35.753) 93.914,35.753 ; U5.5@94.398,34.253 ccw(c94.181,34.47) 94.488,34.47 ccw(c94.795,34.47) U5.5@94.578,34.253 ; U4.14@94.627,27.94 R33.2@97.602,27.94 ; U5.5@94.959,34.073 cw(c95.176,33.856) 95.176,34.163 cw(c95.176,34.47) U5.5@94.959,34.253 ; U4.14@95.549,27.818 cw(c95.845,27.522) 95.845,27.94 cw(c95.845,28.358) U4.14@95.549,28.062 ; 95.973,27.94 ccw(c95.973,29.845) R33.2@97.32,28.498 ; 96.587,27.94 ccw(c96.587,29.231) R33.2@97.5,28.318 ; 96.881,27.94 cw(c96.881,27.319) R33.2@97.32,27.758 ; R33.2@97.42,28.498 ccw(c96.527,29.391) 97.79,29.391 ccw(c99.053,29.391) R33.2@98.16,28.498 ; R33.2@97.79,28.128 97.79,32.893 97.663,33.02 ; R35.2@99.137,32.65 ccw(c98.244,31.757) 98.244,33.02 ccw(c98.244,34.283) R35.2@99.137,33.39 ; R35.2@99.507,33.02 97.663,33.02 ; 93.914,35.753 94.488,35.179 U5.5@94.488,34.163 96.52,34.163 97.663,33.02
  Bottom Layer w0.254: P14.4@9.398,21.209 12.446,21.209 16.891,25.654 16.891,28.956 18.603,30.668 R16.2@20.828,30.668 28.194,30.668 28.255,30.729 29.088,30.729 ; P14.4@9.659,20.948 cw(c10.289,20.318) 10.289,21.209 cw(c10.289,22.1) P14.4@9.659,21.47 ; P14.4@9.839,20.768 cw(c10.902,19.705) 10.902,21.209 cw(c10.902,22.713) P14.4@9.839,21.65 ; v3(10.541,45.72) 12.573,45.72 13.716,44.577 22.352,44.577 23.622,45.847 ; v3@10.805,45.456 cw(c11.441,44.82) 11.441,45.72 cw(c11.441,46.62) v3@10.805,45.984 ; R16.2@20.358,30.298 ccw(c19.465,29.405) 19.465,30.668 ccw(c19.465,31.931) R16.2@20.358,31.038 ; R16.2@21.298,30.298 cw(c22.191,29.405) 22.191,30.668 cw(c22.191,31.931) R16.2@21.298,31.038 ; 21.846,30.668 ccw(c21.846,32.156) R17.2@22.898,31.104 ; 22.165,30.668 cw(c22.165,29.631) R17.2@22.898,30.364 ; 22.459,30.668 ccw(c22.459,31.543) R17.2@23.078,30.924 ; BOOT.2@23.284,46.466 cw(c22.885,45.847) 23.622,45.847 ; BOOT.2@23.622,47.359 ccw(c23.622,48.863) 24.686,47.8 ; BOOT.2@23.622,47.613 ccw(c23.622,49.73) 25.119,48.233 ; R17.2@23.658,30.924 ccw(c24.277,31.543) 24.277,30.668 ; R17.2@23.838,30.364 cw(c24.571,29.631) 24.571,30.668 ; R17.2@23.838,31.104 ccw(c24.89,32.156) 24.89,30.668 ; BOOT.2@23.96,46.466 ccw(c24.359,45.847) 23.622,45.847 ; BOOT.2@24.245,46.99 cw(c25.136,46.99) 24.506,47.62 ; 24.259,30.668 ccw(c24.259,32.156) R18.2@25.311,31.104 ; 24.578,30.668 cw(c24.578,29.631) R18.2@25.311,30.364 ; 24.872,30.668 ccw(c24.872,31.543) R18.2@25.491,30.924 ; R18.2@26.071,30.924 ccw(c26.69,31.543) 26.69,30.668 ; R18.2@26.251,30.364 cw(c26.984,29.631) 26.984,30.668 ; R18.2@26.251,31.104 ccw(c27.303,32.156) 27.303,30.668 ; 26.652,30.668 ccw(c26.652,32.364) C32.2@27.851,31.165 ; C32.2@27.851,30.425 ccw(c27.265,29.839) 27.265,30.668 ccw(c27.265,31.751) C32.2@28.031,30.985 ; C32.2@28.321,30.795 29.022,30.795 29.088,30.729 ; C32.2@28.421,30.272 cw(c28.421,27.558) 30.34,29.477 ; C32.2@28.421,30.526 cw(c28.421,28.426) 29.906,29.911 ; C32.2@28.421,30.78 cw(c28.421,29.293) 29.473,30.344 ; C32.2@28.611,30.985 ccw(c29.23,31.604) 29.23,30.729 ; C32.2@28.791,30.425 cw(c29.524,29.692) 29.524,30.729 ; C32.2@28.791,31.165 ccw(c29.843,32.217) 29.843,30.729 ; SD_CARD.4@30.415,26.187 ccw(c29.608,26.994) 30.749,26.994 ccw(c31.891,26.994) SD_CARD.4@31.084,26.187 ; SD_CARD.4@30.749,25.552 30.749,29.068 29.088,30.729 ; v1@35.941,32.516 cw(c35.941,32.219) 36.151,32.429 cw(c36.361,32.639) v1@36.064,32.639 ; v1(35.941,32.639) 37.719,30.861 R19.2@37.719,30.734 40,30.734 R20.2@40.005,30.729 29.088,30.729 ; 36.344,30.729 ccw(c36.344,32.009) R19.2@37.249,31.104 ; 36.368,30.729 cw(c36.368,29.483) R19.2@37.249,30.364 ; 36.566,32.014 cw(c35.285,30.734) R19.2@37.096,30.734 ; 36.958,30.729 ccw(c36.958,31.395) R19.2@37.429,30.924 ; 36.999,31.581 cw(c36.153,30.734) R19.2@37.35,30.734 ; 37.114,31.466 ccw(c37.619,31.972) R19.2@37.619,31.257 ; R19.2@38.009,30.924 ccw(c38.48,31.395) 38.48,30.729 ; 38.63,30.734 cw(c38.63,29.454) 39.535,30.359 ccw(c38.642,29.466) 38.642,30.729 ccw(c38.642,31.992) 39.535,31.099 cw(c38.654,31.98) 38.654,30.734 ; 39.07,30.729 ccw(c39.07,29.483) 38.189,30.364 cw(c39.082,29.471) 39.082,30.734 cw(c39.082,31.997) 38.189,31.104 ccw(c39.094,32.009) 39.094,30.729 ; 39.244,30.734 cw(c39.244,30.068) R20.2@39.715,30.539 ; v1(46.736,32.131) 70.866,32.131 ; v1@46.823,32.044 cw(c47.033,31.834) 47.033,32.131 cw(c47.033,32.428) v1@46.823,32.218 ; v1@52.324,3.306 cw(c52.324,3.009) 52.534,3.219 cw(c52.744,3.429) v1@52.447,3.429 ; v1(52.324,3.429) 54.102,1.651 83.82,1.651 v1(84.709,2.54) ; v1(70.358,10.033) 70.866,10.541 v1(70.866,14.605) 70.866,32.131 ; v1@70.358,10.156 ccw(c70.358,10.453) 70.568,10.243 ccw(c70.778,10.033) v1@70.481,10.033 ; v1@70.779,14.518 cw(c70.569,14.308) 70.866,14.308 cw(c71.163,14.308) v1@70.953,14.518 ; v1@70.779,14.692 ccw(c70.569,14.902) 70.866,14.902 ccw(c71.163,14.902) v1@70.953,14.692 ; v1@74.168,34.036 72.771,34.036 70.866,32.131 ; v1@74.208,33.949 ccw(c73.998,33.739) 73.998,34.036 ccw(c73.998,34.333) v1@74.208,34.123 ; P15.4@82.689,48.895 ccw(c81.185,48.895) 82.248,49.959 ccw(c83.312,51.022) P15.4@83.312,49.518 ; P15.4@82.943,48.895 ccw(c82.052,48.895) 82.682,49.525 ccw(c83.312,50.155) P15.4@83.312,49.264 ; P15.4@83.312,48.895 81.026,51.181 70.866,51.181 ; v1@84.586,2.54 cw(c84.289,2.54) 84.499,2.33 cw(c84.709,2.12) v1@84.709,2.417 ; 23.622,45.847 BOOT.2@23.622,46.99 23.876,46.99 28.067,51.181 70.866,51.181 ; 70.866,32.131 70.866,51.181
VCC3.3A: C14.1 C15.1 P14.3 U12.31 | length 146.1
  Top Layer w0.254: U12.31@79.563,14.585 81.046,14.585 v1(81.153,14.478) ; 80.598,14.585 cw(c80.598,13.923) v1@81.066,14.391 ; v1(81.407,10.287) C14.1@82.296,10.287 ; v1@81.494,10.2 cw(c81.704,9.99) 81.704,10.287 cw(c81.704,10.584) v1@81.494,10.374 ; C14.1@82.116,10.107 ccw(c81.683,9.674) 81.683,10.287 ccw(c81.683,10.9) 82.116,10.467 ccw(c81.652,10.931) 82.309,10.931 ; C15.1@82.129,11.633 cw(c81.695,11.199) 82.309,11.199 cw(c82.922,11.199) C15.1@82.488,11.633 ; C14.1@82.309,10.3 C15.1@82.309,11.813 ; 82.309,10.87 ccw(c82.879,10.87) C14.1@82.476,10.467
  Bottom Layer w0.254: P14.3@8.775,23.749 cw(c7.271,23.749) 8.334,22.685 cw(c9.398,21.622) P14.3@9.398,23.126 ; P14.3@9.029,23.749 cw(c8.138,23.749) 8.768,23.119 cw(c9.398,22.489) P14.3@9.398,23.38 ; P14.3@9.398,23.749 3.683,18.034 3.683,4.953 5.08,3.556 11.811,3.556 13.462,5.207 20.828,5.207 26.288,-0.253 39.242,-0.253 ; 39.243,-0.254 68.781,-0.254 ; 68.782,-0.253 84.872,-0.253 85.123,-0.002 90.041,-0.002 90.932,0.889 90.932,4.318 84.963,10.287 v1(81.407,10.287) 81.407,14.224 v1(81.153,14.478) ; v1@81.066,14.391 cw(c80.243,13.568) 81.407,13.568 ; v1@81.246,14.571 cw(c80.856,14.181) 81.407,14.181 ; v1@81.32,10.374 ccw(c81.11,10.584) 81.407,10.584 ccw(c81.704,10.584) 81.494,10.374 ccw(c81.704,10.584) 81.704,10.287 ccw(c81.704,9.99) v1@81.494,10.2
VCC5: C1.2 M1.J1_58 M1.J1_59 M1.J1_60 P7.1 P14.5 R9.2 | length 124.9
  Top Layer w0.254: P7.1@8.957,14.03 ccw(c7.894,15.093) 9.398,15.093 ccw(c10.902,15.093) 9.839,14.03 ccw(c10.902,15.093) 10.902,13.589 ccw(c10.902,12.085) P7.1@9.839,13.148 ; P14.5@8.957,18.228 cw(c7.894,17.165) 9.398,17.165 cw(c10.902,17.165) 9.839,18.228 cw(c10.902,17.165) 10.902,18.669 cw(c10.902,20.173) P14.5@9.839,19.11 ; P7.1@9.137,13.85 ccw(c8.507,14.48) 9.398,14.48 ccw(c10.289,14.48) 9.659,13.85 ccw(c10.289,14.48) 10.289,13.589 ccw(c10.289,12.698) P7.1@9.659,13.328 ; P14.5@9.137,18.408 cw(c8.507,17.778) 9.398,17.778 cw(c10.289,17.778) 9.659,18.408 cw(c10.289,17.778) 10.289,18.669 cw(c10.289,19.56) P14.5@9.659,18.93 ; C1.2@14.754,25.928 cw(c13.887,25.061) 15.113,25.061 cw(c16.339,25.061) C1.2@15.472,25.928 ; C1.2@15.113,26.162 15.113,19.558 14.224,18.669 P14.5@9.398,18.669 P7.1@9.398,13.589 15.24,13.589 17.399,11.43 32.385,11.43 32.385,12.446 32.693,12.754 45.012,12.754 45.593,13.335 54.991,13.335 55.395,13.739 M1.J1_58@55.395,15.049 M1.J1_59@56.195,15.049 M1.J1_60@56.995,15.049 ; M1.J1_60@57.023,15.113 57.023,13.716 59.182,11.557 59.182,8.636 v1(61.341,6.477) ; v1@61.218,6.477 ccw(c60.921,6.477) 61.131,6.687 ccw(c61.341,6.897) v1@61.341,6.6 ; R9.2@84.007,8.605 cw(c84.33,8.351) 84.33,8.761 ; R9.2@84.007,8.918 ccw(c84.33,9.171) 84.33,8.761 ; R9.2@84.076,8.761 R9.2@83.807,8.761 84.33,8.761 ; v1@84.713,8.255 ccw(c84.416,8.255) 84.626,8.465 ccw(c84.836,8.675) v1@84.836,8.378 ; v1(84.836,8.255) 84.33,8.761
  Bottom Layer w0.254: v1(61.341,6.477) 70.231,6.477 72.009,8.255 v1(84.836,8.255) ; v1@61.428,6.39 cw(c61.638,6.18) 61.638,6.477 cw(c61.638,6.774) v1@61.428,6.564 ; v1@84.749,8.168 ccw(c84.539,7.958) 84.539,8.255 ccw(c84.539,8.552) v1@84.749,8.342
VREF+: C2.2 M1.J1_2 R3.1 | length 14.4
  Top Layer w0.254: R3.1@53.605,5.461 C2.2@56.007,5.461 56.195,5.649 M1.J1_2@56.195,11.049 ; R3.1@53.939,5.127 cw(c54.747,4.319) 54.747,5.461 cw(c54.747,6.603) R3.1@53.939,5.795 ; C2.2@55.521,5.102 ccw(c54.654,4.235) 54.654,5.461 ccw(c54.654,6.687) C2.2@55.521,5.82 ; C2.2@55.775,5.82 ccw(c54.76,6.835) 56.195,6.835 ; C2.2@55.954,5.641 ccw(c55.374,6.221) 56.195,6.221 ; 56.195,6.54 ccw(c57.213,6.54) C2.2@56.493,5.82
pads on no net: J1.19 J1.20 M1.J1_6 M1.J1_9 M1.J1_10 M1.J1_11 M1.J1_12 M1.J1_13 M1.J1_14 M1.J1_15 M1.J1_23 M1.J1_24 M1.J1_28 M1.J1_29 M1.J1_32 M1.J1_46 M1.J1_48 M1.J1_49 M1.J1_50 M1.J1_51 M1.J1_52 M1.J1_53 M1.J1_54 M1.J1_56 M1.J1_57 M1.J2_1 M1.J2_2 M1.J2_4 M1.J2_5 M1.J2_6 M1.J2_7 M1.J2_8 M1.J2_9 M1.J2_10 M1.J2_11 M1.J2_12 M1.J2_13 M1.J2_14 M1.J2_15 M1.J2_21 M1.J2_22 M1.J2_23 M1.J2_24 M1.J2_25 M1.J2_26 M1.J2_27 M1.J2_28 M1.J2_30 M1.J2_32 M1.J2_33 M1.J2_34 M1.J2_36 M1.J2_37 M1.J2_38 M1.J2_39 M1.J2_40 M1.J2_41 M1.J2_43 M1.J2_44 M1.J2_45 M1.J2_46 M1.J2_47 M1.J2_48 M1.J2_49 M1.J2_50 M1.J2_51 M1.J2_52 M1.J2_53 M1.J2_54 M1.J2_55 M1.J2_56 M1.J2_57 M1.J2_58 M1.J2_59 M1.J2_60 SD_CARD.10 SD_CARD.11 SD_CARD.12 U4.8 U4.9 U4.10 U5.1 U12.3 U12.6 U12.15 U12.21 U12.22 U12.29 U12.30 U20.2 U20.3 U20.4 U20.5 U20.6 U20.7 U20.14 U20.15 U20.16 U20.17 U20.19 U20.21 U20.25

## Keep-outs
Keep-Out Layer:
  circle w0.254: c4.7,50.482 r1.6
  circle w0.254: c104.9,6.1 r1.6
  circle w0.254: c89.9,50.682 r1.6
  circle w0.254: c104.87,45.066 r1.6
  circle w0.254: c27.38,6.06 r1.6
  lines w0.254: -0.004,-0.094 ccw(c52.086,1335.3) 110.1,0.15 ; 0,0 0,52.324 ; 0.026,52.329 cw(c55.245,-214.452) 110.016,52.421 ; 110.109,0.15 110.109,52.324

## Text inside footprints (layer, text, board x,y; h text height)
J1: Top Overlay "1" at 8.567,45.14 h1.5 r270; Top Overlay "18" at 8.567,37.49 h1.5 r270